# Altium PCB Mach trai tim - Hieu.PcbDoc
Units mm, origin at the board's own origin, x right, y up, seen from the top; angles counter-clockwise.
Board outline 100 x 101.04 mm, 2 copper layers (Top Layer, Bottom Layer); 28 components, 26 nets, 77 pads, 0 vias.
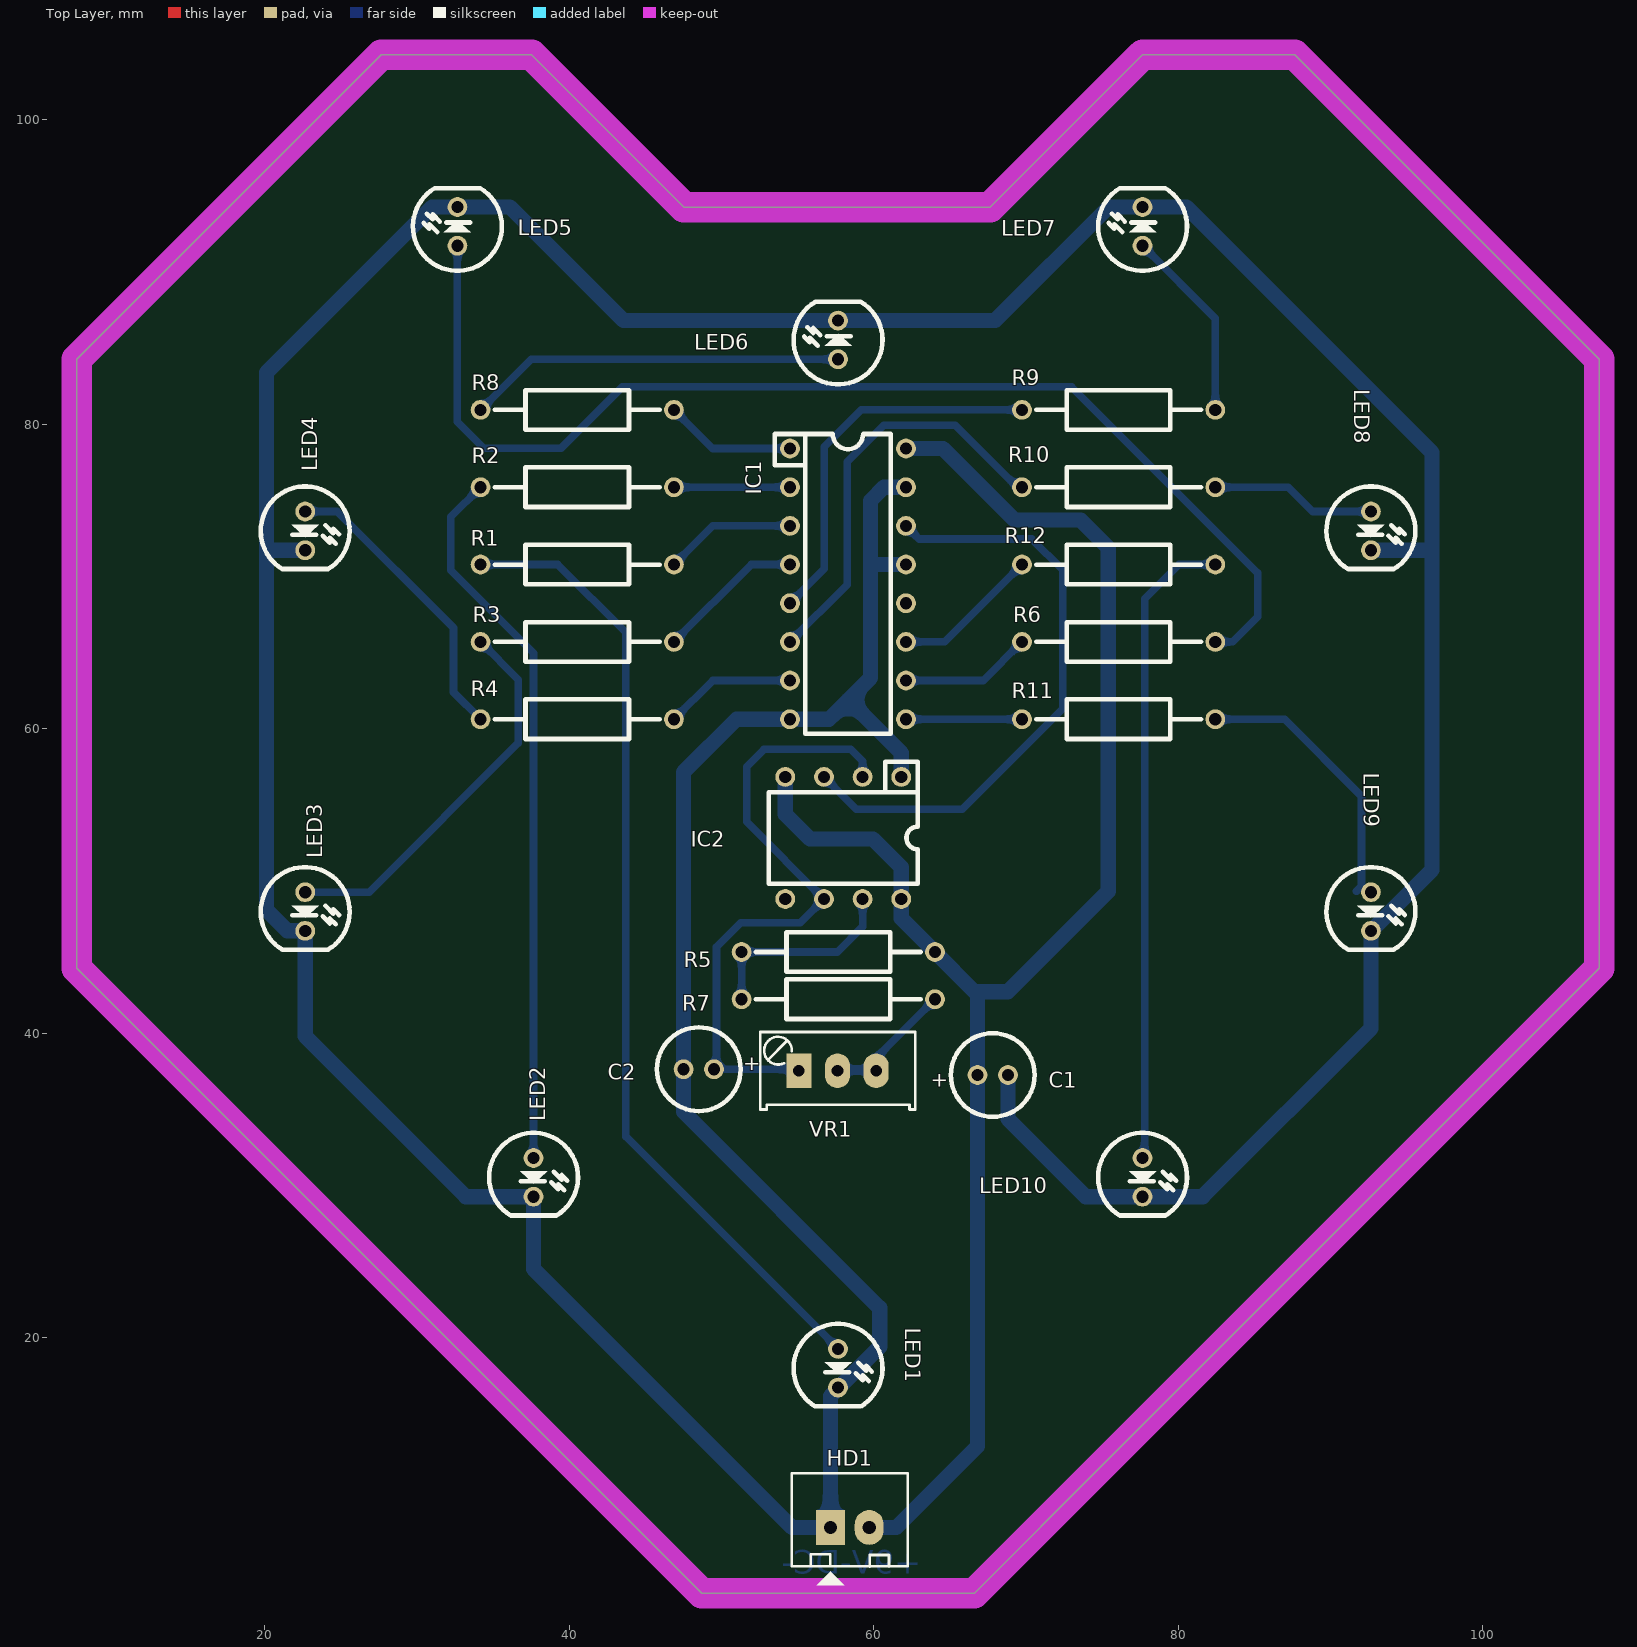
[diagram p0: Top Layer view]
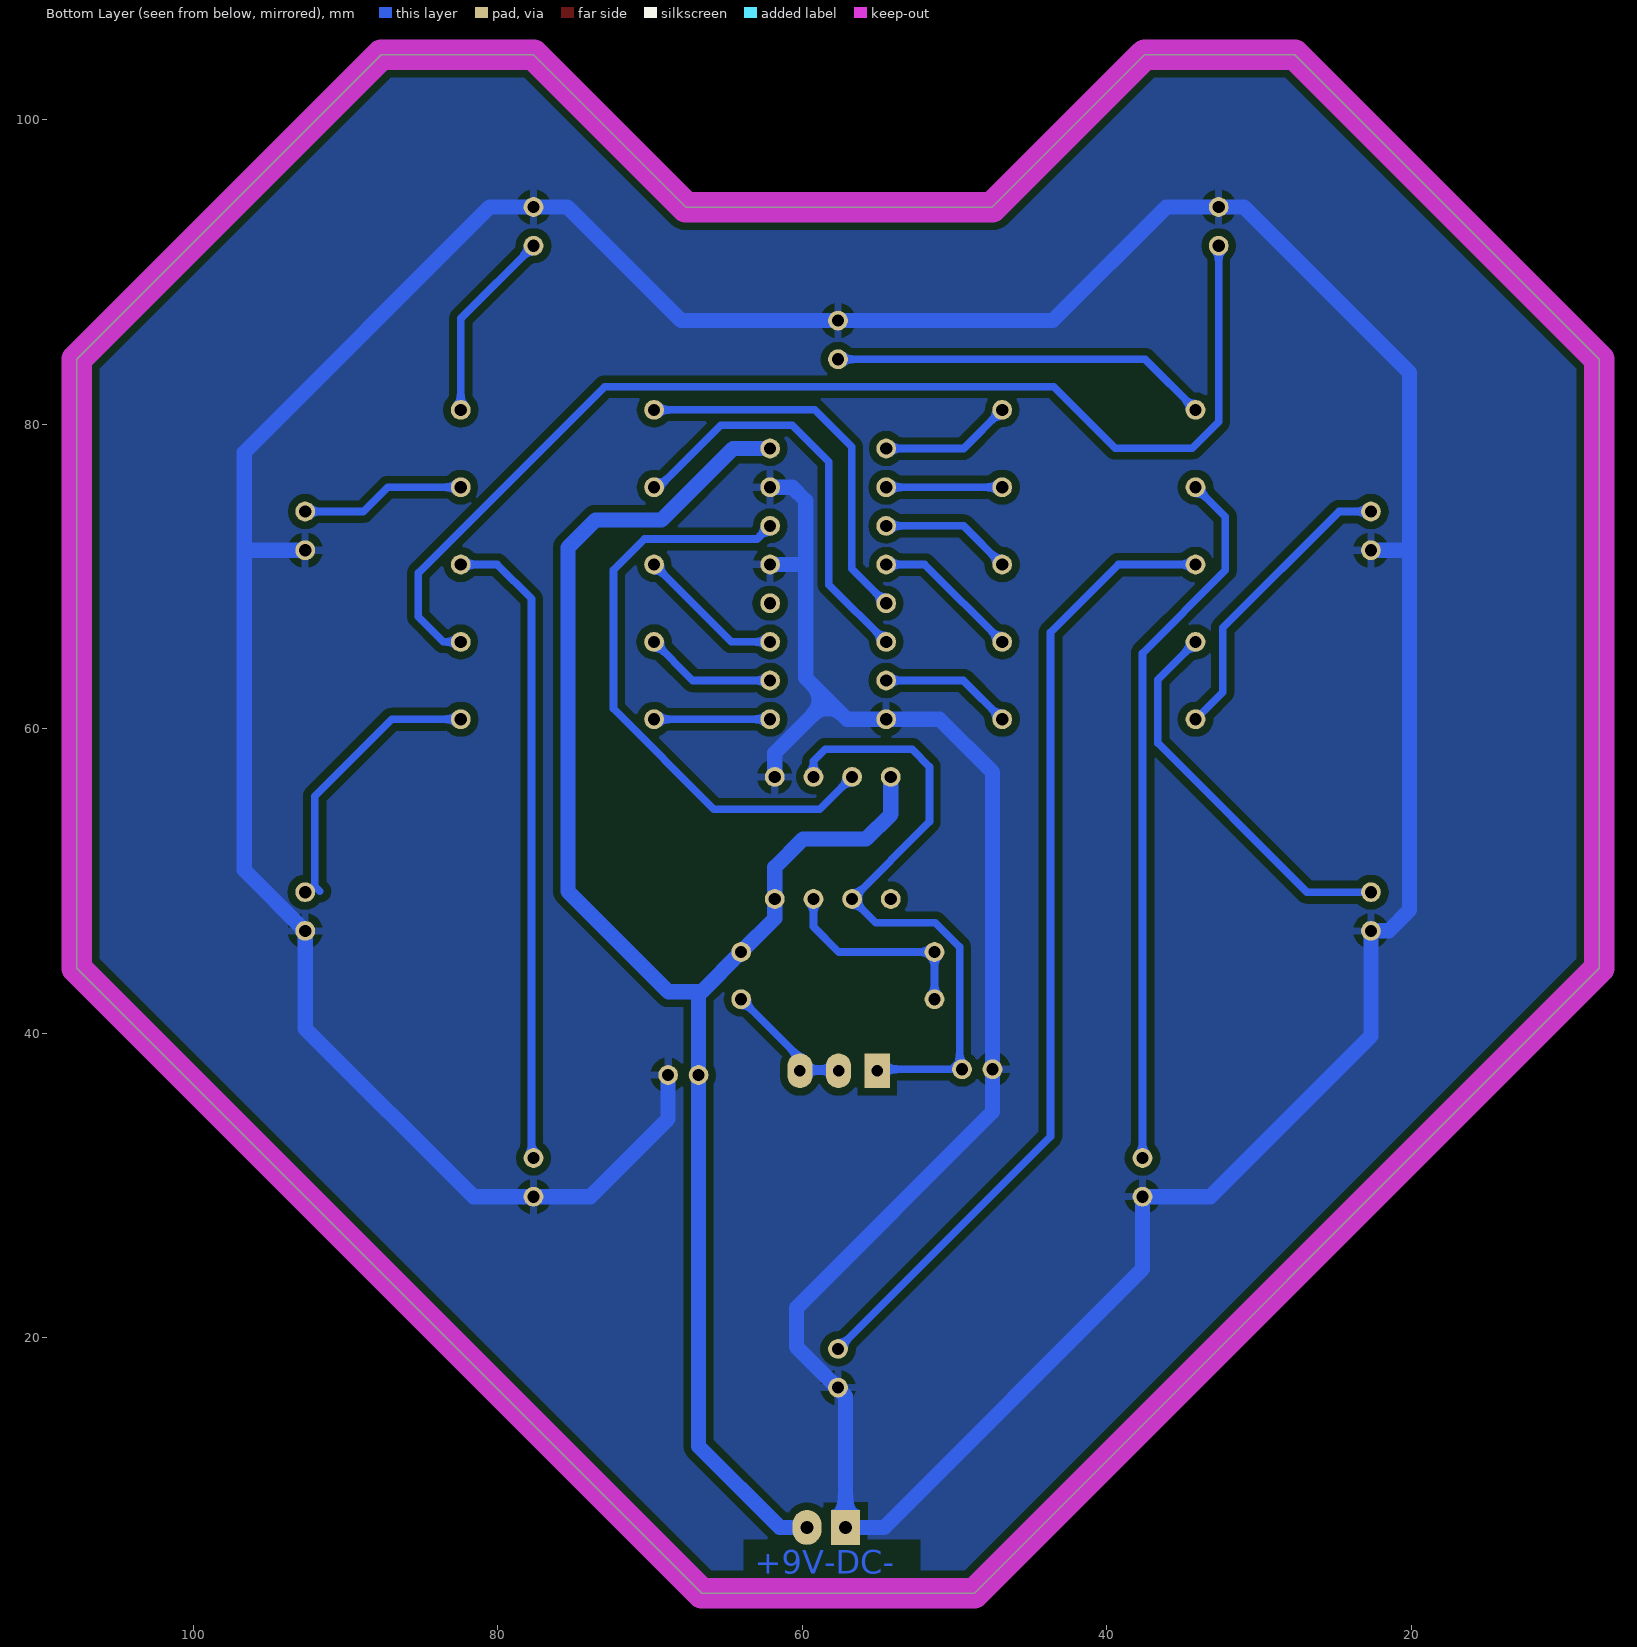
[diagram p1: Bottom Layer view, seen from below]
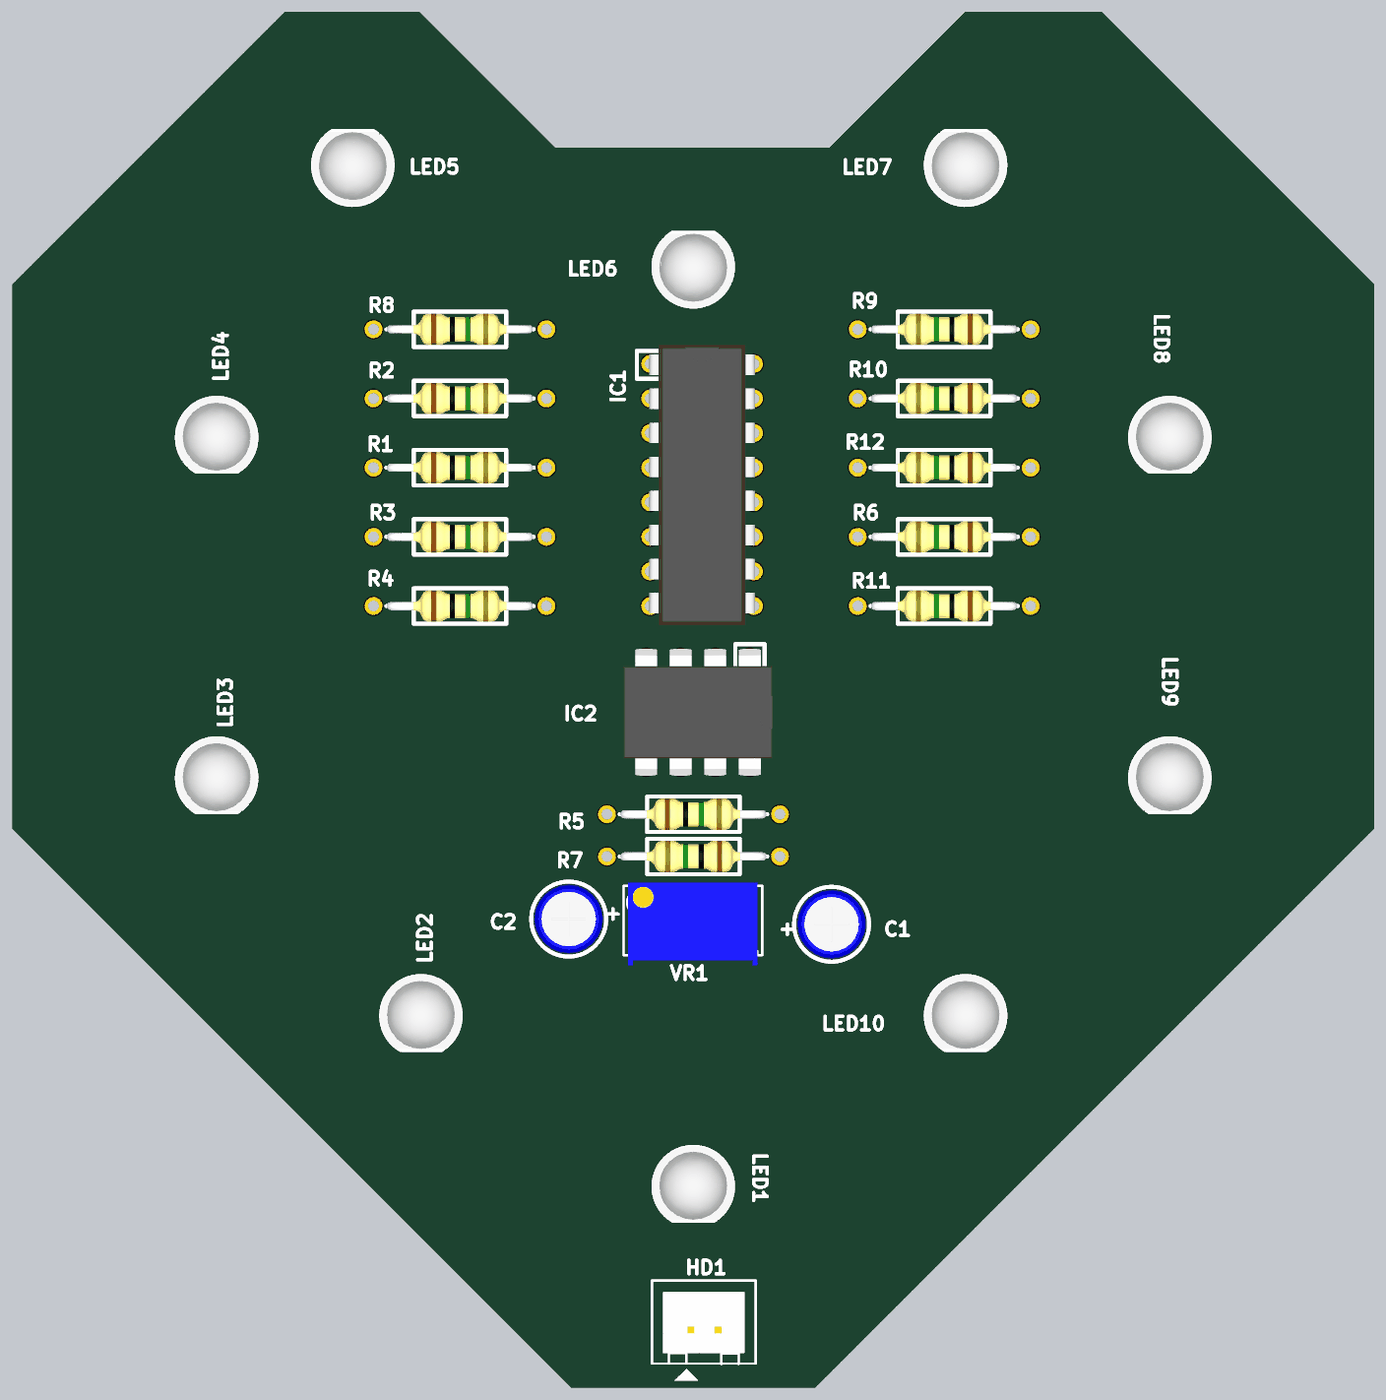
[diagram p2: 3D render of the assembled board from above, using the file's embedded part models]

## Layer stack, top to bottom
Top Solder: solder mask 0.0102, Solder Resist, Dk 3.5
Top Layer: signal copper 0.0356
Dielectric 1: dielectric 0.32, FR-4, Dk 4.8
Bottom Layer: signal copper 0.0356
Bottom Solder: solder mask 0.0102, Solder Resist, Dk 3.5

## Board outline
7.643,44.27 7.643,84.27 27.643,104.27 37.513,104.27 47.513,94.27 67.643,94.27 77.643,104.27 87.643,104.27 107.643,84.27 107.643,44.27 75.362,11.989 66.599,3.226 48.687,3.226

## Design rules (kind name [scope] priority, off if disabled: settings)
Clearance [All] p1: gap=0.5 ignorepadtopadclearanceinfootprint=FALSE except(0: Arc-Hole Track-Hole SMDPad-Hole THPad-Hole Via-Hole Fill-Hole Poly-Hole Region-Hole Text-Hole)
PlaneClearance [All] p1: clearance=0.5
PlaneConnect [All] p1: planeconnectstyle=Relief reliefexpansion=0.5 reliefentries=4 reliefconductorwidth=0.5 reliefairgap=0.5
PolygonConnect [All] p1: connectstyle=Relief reliefconductorwidth=0.5 reliefentries=4 polygonreliefangle="90 Angle" airgapwidth=0.5
RoutingCorners RoutingCorners_S [InNetClass('Nets_S')] p1: cornerstyle=45-Degree minsetback=1.5 maxsetback=1.5
RoutingCorners RoutingCorners_G [InNetClass('Nets_G')] p2: cornerstyle=45-Degree minsetback=3 maxsetback=3
RoutingVias RoutingVias_S [InNetClass('Nets_S')] p1: holewidth=0.4 width=0.7 viastyle="Through Hole" minholewidth=0.4 minwidth=0.7 maxholewidth=0.4 maxwidth=0.7
RoutingVias RoutingVias_G [InNetClass('Nets_G')] p2: holewidth=0.6 width=1.1 viastyle="Through Hole" minholewidth=0.6 minwidth=1.1 maxholewidth=0.6 maxwidth=1.1
SolderMaskExpansion [All] p1: expansion=0.102
Width [All] p1: maxlimit=1 minlimit=0.5 preferedwidth=0.5
Width Width_S [InNetClass('Nets_S')] p2: maxlimit=0.5 minlimit=0.5 preferedwidth=0.5
Width Width_G [InNetClass('Nets_G')] p3: maxlimit=1.5 minlimit=1 preferedwidth=1
27 further rules are at their usual default settings.

## Classes and differential pairs
component class machtraitim: C1 HD1 IC1 IC2 LED1 LED3 LED4 LED5 LED6 LED7 LED8 LED9 LED10 R1 R2 R3 R4 R5 R6 R7 R8 R9 R10 R11 R12 VR1
net class Nets_S: NetC2_1 NetIC1_1 NetIC1_2 NetIC1_3 NetIC1_4 NetIC1_5 NetIC1_6 NetIC1_7 NetIC1_9 NetIC1_10 NetIC1_11 NetIC1_14 NetIC2_7 NetLED1_1 NetLED2_1 NetLED3_1 NetLED4_1 NetLED5_1 NetLED6_1 NetLED7_1 NetLED8_1 NetLED9_1 NetLED10_1 NetR7_1
net class Nets_G: GND VCC

## Components (designator, comment, footprint, x,y, rotation, side; value= is the part's Value field where it differs from the comment)
C1 "10uF ,50v" CAP_1UF_50V 66.802,37.262 r0 top
C2 "10uF ,50v" CAP_1UF_50V 49.498,37.643 r180 top
HD1 "Header 2" CON2 57.15,7.544 r0 top
IC1 "4017" 74HC4017 58.293,69.52 r270 top
IC2 "LM555" LM555 61.798,56.844 r180 top
LED1 "LED_R_3" LED5R 57.643,19.27 r270 top
LED2 "LED_R_3" LED5R 37.643,31.81 r270 top
LED3 "LED_R_3" LED5R 22.643,49.27 r270 top
LED4 "LED_R_3" LED5R 22.643,74.27 r270 top
LED5 "LED_R_3" LED5R 32.643,91.73 r90 top
LED6 "LED_R_3" LED5R 57.643,84.27 r90 top
LED7 "LED_R_3" LED5R 77.643,91.73 r90 top
LED8 "LED_R_3" LED5R 92.643,74.27 r270 top
LED9 "LED_R_3" LED5R 92.643,49.27 r270 top
LED10 "LED_R_3" LED5R 77.643,31.81 r270 top
R1 "CF1/4W1KJ25" "RES 1/4W CFR25" 34.163,70.79 r0 top
R2 "CF1/4W1KJ25" "RES 1/4W CFR25" 34.163,75.87 r0 top
R3 "CF1/4W1KJ25" "RES 1/4W CFR25" 34.163,65.71 r0 top
R4 "CF1/4W1KJ25" "RES 1/4W CFR25" 34.163,60.63 r0 top
R5 "CF1/4W1KJ25" "RES 1/4W CFR25" 51.308,45.339 r0 top
R6 "CF1/4W1KJ25" "RES 1/4W CFR25" 82.423,65.71 r180 top
R7 "CF1/4W1KJ25" "RES 1/4W CFR25" 64.008,42.24 r180 top
R8 "CF1/4W1KJ25" "RES 1/4W CFR25" 34.163,80.95 r0 top
R9 "CF1/4W1KJ25" "RES 1/4W CFR25" 82.423,80.95 r180 top
R10 "CF1/4W1KJ25" "RES 1/4W CFR25" 82.423,75.87 r180 top
R11 "CF1/4W1KJ25" "RES 1/4W CFR25" 82.423,60.63 r180 top
R12 "CF1/4W1KJ25" "RES 1/4W CFR25" 82.423,70.79 r180 top
VR1 "10K" VR1 55.067,37.541 r0 top

## Footprints (in the part's own frame and the unit in brackets; to place one, negate y for a bottom-side part, rotate by r counter-clockwise, add the part's x,y. Pads: shape width x height; smd on the part's side, far side on the other; paste and mask are expansions set on the pad)
74HC4017 [mm] "DIP 16, 16 PIN, W 7.62, Pin to pin 2.54MM"
  round 1.3 hole 0.8: 1(-8.89,-3.81) 2(-6.35,-3.81) 3(-3.81,-3.81) 4(-1.27,-3.81) 5(1.27,-3.81) 6(3.81,-3.81) 7(6.35,-3.81) 8(8.89,-3.81) 9(8.89,3.81) 10(6.35,3.81) 11(3.81,3.81) 12(1.27,3.81) 13(-1.27,3.81) 14(-3.81,3.81) 15(-6.35,3.81) 16(-8.89,3.81)
  silkscreen extent -9.84,-4.8 9.84,2.8, body extent -10.3,-3.88 10.3,3.88, height 4.5
CAP_1UF_50V [mm] "Capacitor, Electrolytic, Radial; Body 5 x 11 mm (Dia.xH typ); Pin Spacing 2 mm (typ)"
  round 1.3 hole 0.8: 1(0,0) 2(2,0)
  silkscreen extent -1.75,-2.75 3.75,2.75, body extent -1.53,-2.53 3.53,2.53, height 11.53
CON2 [mil] "CON2"
  rect 75x90 hole 34: 1(0,0)
  oval 75x90 hole 34: 2(100,0)
  silkscreen extent -100,-150 200,140, body extent -68,-70 168,107, height 236
LED5R [mm] "LED, RED, 2 LEAD, 5mm"
  round 1.3 hole 0.8: 1(0,0) 2(2.54,0)
  silkscreen extent -1.65,-2.92 3.77,2.92, body extent -1.71,-3.01 3.71,3.01, height 12.31
LM555 [mm] "DIP8"
  round 1.3 hole 0.8 mask+0.1: 1(0,0) 2(2.54,0) 3(5.08,0) 4(7.62,0) 5(7.62,8.025) 6(5.08,8.025) 7(2.54,8.025) 8(0,8.025)
  silkscreen extent -1.09,-0.99 8.71,7.01, body extent -1.69,-1.19 9.31,9.22, height 4.4
"RES 1/4W CFR25" [mm] "Axial Device, Thru-Hole; 2 Leads fi 0.55"
  round 1.3 hole 0.8 mask+0.1: 1(0,0) 2(12.7,0)
  silkscreen extent 0.94,-1.3 11.76,1.3, body extent 0.97,-1.16 11.74,1.16, height 2.93
VR1 [mil] "Variable Resistor"
  rect 65x90 hole 30: 1(0,0)
  oval 65x90 hole 30: 2(100,0) 3(200,0)
  silkscreen extent -100,-100 301,100, body extent -88,-130 288,110, height 455

## Part data
C1 C2: library part CP1, "Cap P  0,1uF < 22uF , 16 - 50V"
HD1: library part Hed2, "Header 2 (Green)"
IC1: "Decade Counter/Divider with 10 Decoded Outputs"
IC2: "Timer"
LED1 LED2 LED3 LED4 LED5 LED6 LED7 LED8 LED9 LED10: library part LED_RED_3MM, "LED Red 3mm"
R1 R2 R3 R4 R5 R6 R7 R8 R9 R10 R11 R12: "RES CF AXIAL-0.3 5% 1/4W 1K"
VR1: library part VR1, "Var Resistor"

## Nets (pads, with @x,y where several pads share a name; then routed paths per layer and width w, separated by ;. In a path a pad name is that pad's centre, name@x,y a point inside that pad or via, vN(x,y) a via of type N, cw(c..) or ccw(c..) an arc to the next point about the centre after c; other vN are vias at no path point)
GND: C1.2 C2.2 HD1.1 IC1.8 IC1.13 IC1.15 IC2.1 LED1.2 LED2.2 LED3.2 LED4.2 LED5.2 LED6.2 LED7.2 LED8.2 LED9.2 LED10.2 | length 363.3
  Bottom Layer w1: LED3.2@22.643,46.242 22.643,39.816 33.189,29.27 LED2.2 37.643,24.511 54.61,7.544 HD1.1 57.15,16.18 60.376,19.406 60.376,21.971 47.498,34.849 C2.2 47.498,57.15 50.978,60.63 IC1.8 57.048,60.63 58.318,61.9 ; LED3.2 21.469,46.73 20.103,48.096 20.103,71.476 ; LED4.2 20.357,71.73 20.103,71.476 ; IC2.1 61.798,58.42 58.318,61.9 ; IC1.13 59.868,70.79 59.766,70.688 ; IC1.15 60.655,75.87 59.766,74.981 59.766,70.688 ; C1.2@68.809,37.262 68.809,34.366 73.905,29.27 LED10.2 81.594,29.27 92.643,40.319 LED9.2 96.647,50.734 96.647,71.628 ; LED8.2 96.545,71.73 96.647,71.628 ; 20.103,71.476 20.103,83.4 30.973,94.27 LED5.2 36.083,94.27 43.543,86.81 LED6.2 67.963,86.81 75.423,94.27 LED7.2 80.533,94.27 96.647,78.156 96.647,71.628 ; 58.318,61.9 59.766,63.348 59.766,70.688
NetC2_1: C2.1 IC2.2 IC2.6 VR1.1 | length 42.2
  Bottom Layer w0.5: VR1.1@55.524,37.643 50.165,37.643 49.657,38.151 49.657,45.668 51.259,47.269 55.169,47.269 IC2.6 51.638,53.899 51.638,57.506 52.781,58.649 58.471,58.649 59.258,57.861 IC2.2
NetIC1_1: IC1.1 R8.2 | length 8.7
  Bottom Layer w0.5: R8.2 49.403,78.41 IC1.1
NetIC1_2: IC1.2 R2.2 | length 7.6
  Bottom Layer w0.5: R2.2 IC1.2
NetIC1_3: IC1.3 R1.2 | length 8.7
  Bottom Layer w0.5: R1.2 49.403,73.33 IC1.3
NetIC1_4: IC1.4 R3.2 | length 9.7
  Bottom Layer w0.5: R3.2 51.943,70.79 IC1.4
NetIC1_5: IC1.5 R9.2 | length 25.2
  Bottom Layer w0.5: IC1.5 56.744,70.51 56.744,78.511 59.182,80.95 R9.2
NetIC1_6: IC1.6 R10.2 | length 27.6
  Bottom Layer w0.5: IC1.6 58.242,69.469 58.242,77.546 60.646,79.95 65.338,79.95 69.418,75.87 R10.2
NetIC1_7: IC1.7 R4.2 | length 8.7
  Bottom Layer w0.5: R4.2 49.403,63.17 IC1.7
NetIC1_9: IC1.9 R11.2 | length 7.6
  Bottom Layer w0.5: IC1.9 R11.2
NetIC1_10: IC1.10 R6.2 | length 8.7
  Bottom Layer w0.5: IC1.10 67.183,63.17 R6.2
NetIC1_11: IC1.11 R12.2 | length 9.7
  Bottom Layer w0.5: IC1.11 64.643,65.71 R12.2
NetIC1_14: IC1.14 IC2.3 | length 39.9
  Bottom Layer w0.5: IC2.3 58.838,54.724 65.798,54.724 72.39,61.316 72.39,70.434 70.358,72.466 62.967,72.466 IC1.14
NetIC2_7: IC2.7 R5.1 R7.2 | length 13.5
  Bottom Layer w0.5: R7.2 R5.1 57.582,45.339 59.258,47.015 IC2.7
NetLED1_1: LED1.1 R1.1 | length 64.2
  Bottom Layer w0.5: R1.1 39.243,70.79 43.688,66.345 43.688,33.225 LED1.1
NetLED2_1: LED2.1 R2.1 | length 47.1
  Bottom Layer w0.5: R2.1 32.207,73.914 32.207,70.409 37.643,64.973 LED2.1
NetLED3_1: LED3.1 R3.1 | length 25.7
  Bottom Layer w0.5: LED3.1 26.842,49.27 36.643,59.071 36.643,63.23 R3.1
NetLED4_1: LED4.1 R4.1 | length 19.6
  Bottom Layer w0.5: LED4.1 24.739,74.27 32.385,66.624 32.385,62.408 R4.1
NetLED5_1: LED5.1 R6.1 | length 78
  Bottom Layer w0.5: LED5.1 32.643,80.158 34.366,78.435 39.446,78.435 43.485,82.474 72.974,82.474 85.217,70.231 85.217,67.361 83.566,65.71 R6.1
NetLED6_1: LED6.1 R8.1 | length 24.9
  Bottom Layer w0.5: R8.1 37.483,84.27 LED6.1
NetLED7_1: LED7.1 R9.1 | length 12.8
  Bottom Layer w0.5: LED7.1 82.423,86.95 R9.1
NetLED8_1: LED8.1 R10.1 | length 10.9
  Bottom Layer w0.5: R10.1 87.224,75.87 88.824,74.27 LED8.1
NetLED9_1: LED9.1 R11.1 | length 18.1
  Bottom Layer w0.5: R11.1 86.97,60.63 92.024,55.575 92.024,49.657 91.694,49.327
NetLED10_1: LED10.1 R12.1 | length 42.4
  Bottom Layer w0.5: LED10.1 77.775,31.942 77.775,68.529 80.035,70.79 R12.1
NetR7_1: R7.1 VR1.2 VR1.3 | length 11
  Bottom Layer w0.5: VR1.2 VR1.3 VR1.3@60.249,37.643 ; VR1.2@58.064,37.643 VR1.3@60.249,37.643 ; R7.1 60.249,38.481 VR1.3@60.249,37.643
VCC: C1.1 HD1.2 IC1.16 IC2.4 IC2.8 R5.2 | length 110.9
  Bottom Layer w1: IC2.4 54.178,54.381 55.804,52.756 59.944,52.756 61.798,50.902 IC2.8 61.798,47.549 R5.2 66.624,42.723 66.802,42.723 ; HD1.2 61.468,7.544 66.802,12.878 C1.1 66.802,42.723 ; IC1.16 64.541,78.41 69.235,73.716 73.578,73.716 75.387,71.907 75.387,49.327 68.783,42.723 66.802,42.723
pads on no net: IC1.12 IC2.5

## Polygon pours and split planes (outlines as drawn)
GND on Bottom Layer "Keep-Out Layer-No Net" (solid, remove dead copper, pour order 3): -2.718,110.185 -2.718,-0.864 116.103,-0.864 118.008,-0.864 118.008,109.55

## Keep-outs
Keep-Out Layer:
  the board outline again, w2

## Other copper
Bottom Layer:
  text "+9V-DC-" at 63.119,4.496 h1.52

## Text inside footprints (layer, text, board x,y; h text height)
C1: Top Overlay "+" at 63.738,36.5 h1; Mechanical 1 "+" at 65.302,36.762 h1; Mechanical 1 "1" at 66.602,36.762 h1; Mechanical 1 "2" at 68.502,36.762 h1
C2: Top Overlay "+" at 52.562,38.405 h1 r180; Mechanical 1 "+" at 50.998,38.143 h1 r180; Mechanical 1 "1" at 49.698,38.143 h1 r180; Mechanical 1 "2" at 47.798,38.143 h1 r180
IC1: Mechanical 1 "16" at 60.293,78.76 h1 r270; Mechanical 1 "9" at 60.173,60.95 h1 r270; Mechanical 1 "8" at 55.353,61.11 h1 r270; Mechanical 1 "1" at 55.393,78.66 h1 r270
IC2: Mechanical 1 "8" at 62.238,51.081 h1 r180; Mechanical 1 "5" at 54.488,51.081 h1 r180; Mechanical 1 "4" at 54.488,55.581 h1 r180; Mechanical 1 "1" at 61.738,55.581 h1 r180